# Allegro board StationTestCard.brd
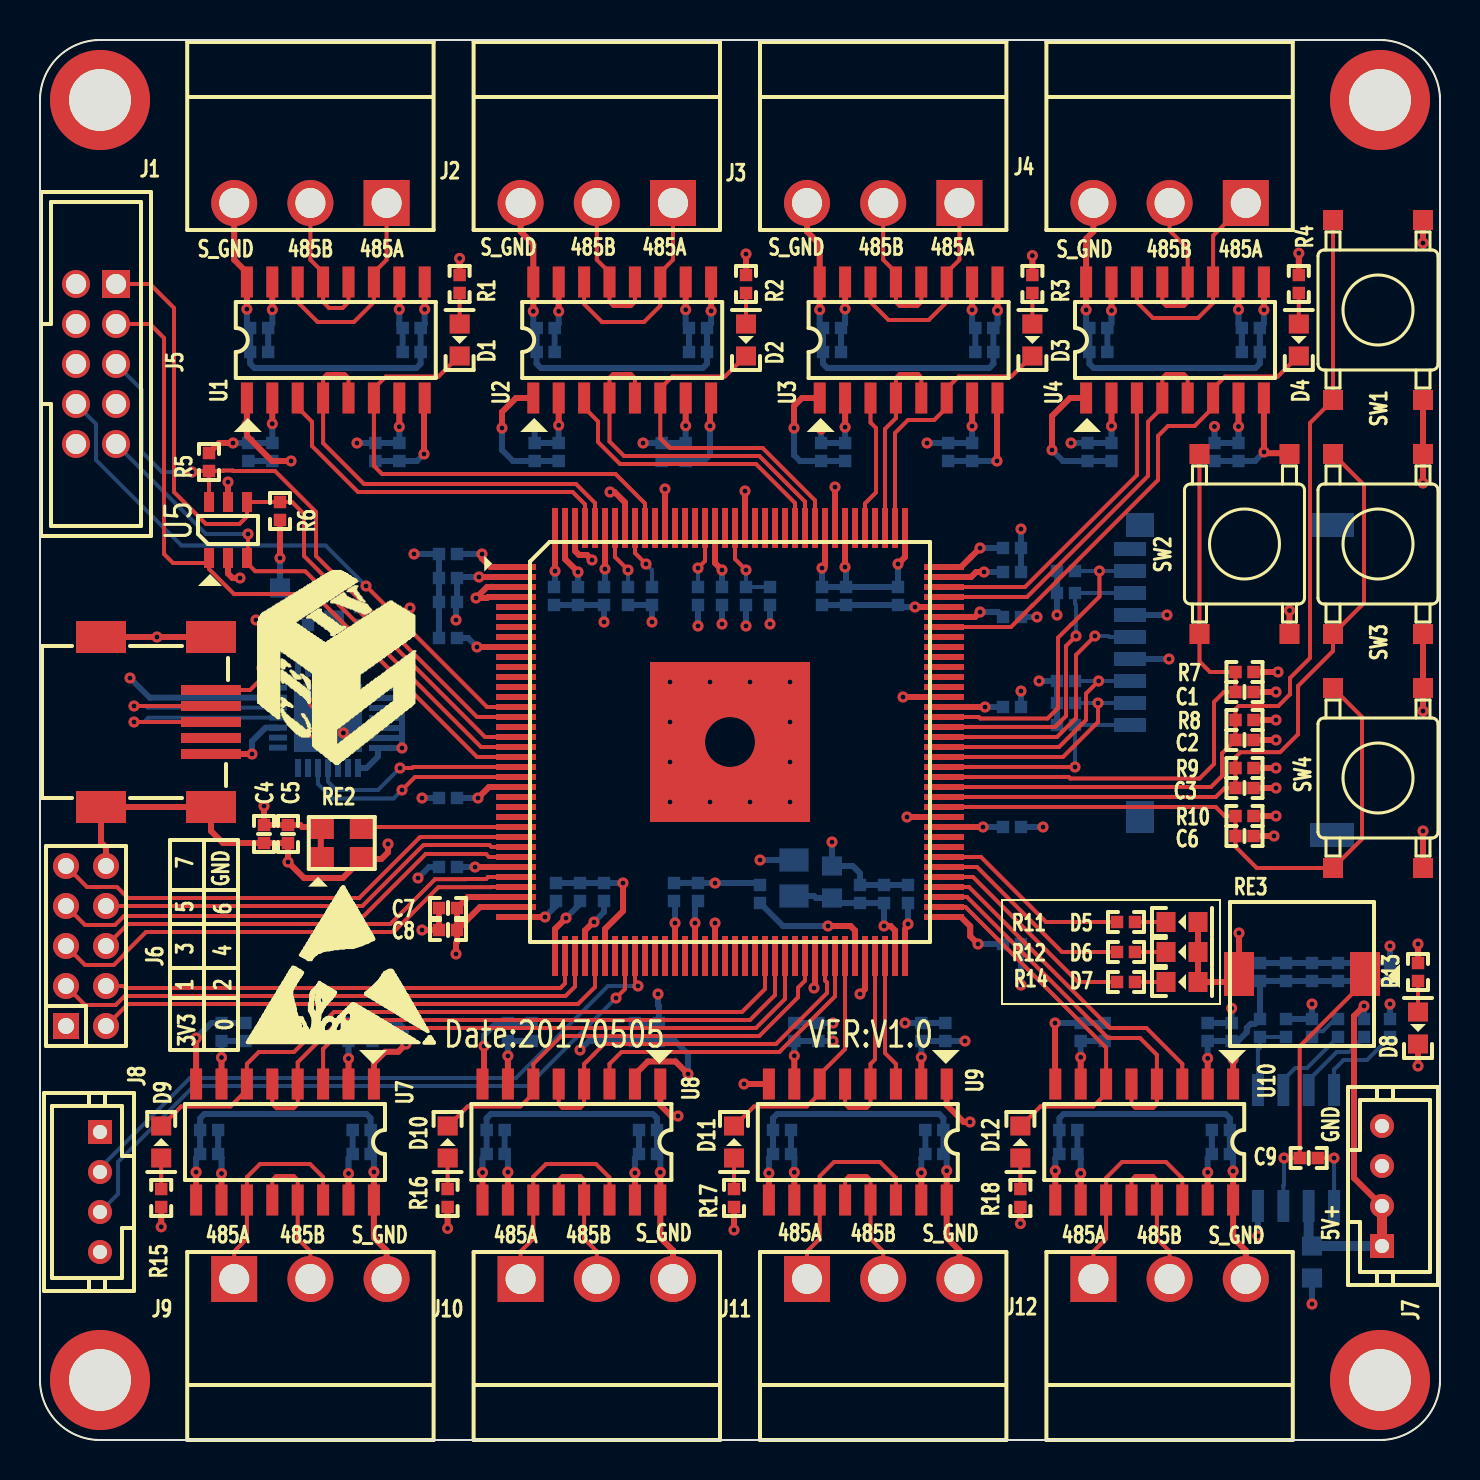
[diagram p0: board, top side]
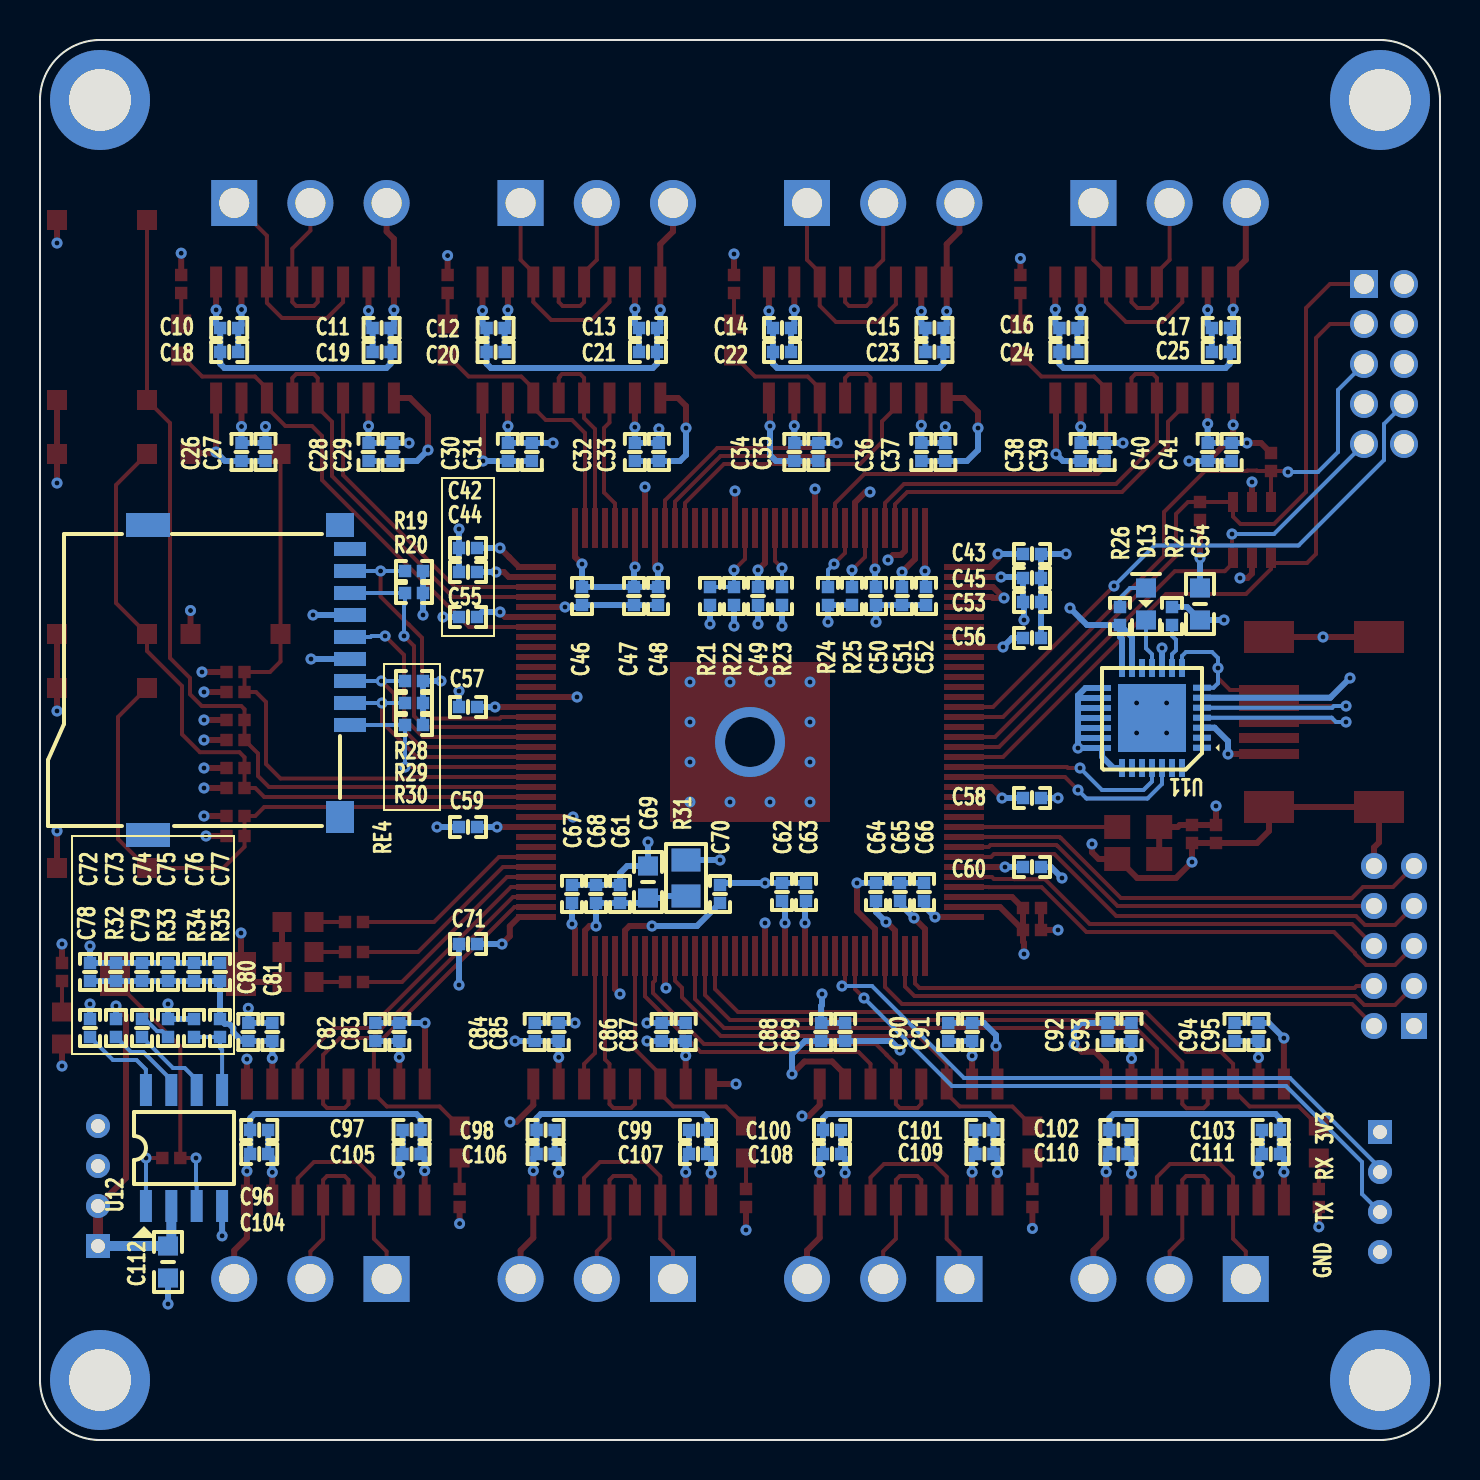
[diagram p1: board, bottom side, seen from below]

Outline 70 x 70 mm; copper layers: TOP, GND, POWER, BOTTOM. Coordinates in mm from the lower left corner of the outline.

## Design rules (mm)
net group DIFF-USB1: nets D+ D-
net group DIFFPAIR1: nets RS485_A1 RS485_B1
net group DIFFPAIR2: nets RS485_A2 RS485_B2
net group DIFFPAIR3: nets RS485_A3 RS485_B3
net group DIFFPAIR4: nets RS485_A4 RS485_B4
net group DIFFPAIR5: nets RS485_A5 RS485_B5
net group DIFFPAIR6: nets RS485_A6 RS485_B6
net group DIFFPAIR7: nets RS485_A7 RS485_B7
net group DIFFPAIR8: nets RS485_A8 RS485_B8
net group POWER: nets A3V3 VCC_5V

## Placement (name value [footprint] x y rotation side)
C1  0.1uF,16V  [CC0402]  60.22 37.4 180 top
C2  0.1uF,16V  [CC0402]  60.22 35 180 top
C3  0.1uF,16V  [CC0402]  60.22 32.6 180 top
C4  2.2uF,16V  [CC0402]  11.2 30.3 270 top
C5  0.1uF,16V  [CC0402]  12.4 30.3 270 top
C6  0.1uF,16V  [CC0402]  60.22 30.2 180 top
C7  0.1uF,16V  [CC0402]  20.4 26.6 0 top
C8  0.1uF,16V  [CC0402]  20.4 25.5 0 top
C9  10nF,16V  [CC0402]  63.44 14.1 0 top
C10  10uF,10V  [CC0402]  60.54 55.6 180 bottom
C11  0.1uF,16V  [CC0402]  52.92 55.6 180 bottom
C12  10uF,10V  [CC0402]  47.22 55.6 180 bottom
C13  0.1uF,16V  [CC0402]  39.6 55.6 180 bottom
C14  10uF,10V  [CC0402]  32.9 55.6 180 bottom
C15  0.1uF,16V  [CC0402]  25.28 55.6 180 bottom
C16  10uF,10V  [CC0402]  18.58 55.6 180 bottom
C17  0.1uF,16V  [CC0402]  10.96 55.6 180 bottom
C18  0.1uF,16V  [CC0402]  60.54 54.4 180 bottom
C19  10nF,16V  [CC0402]  52.92 54.4 180 bottom
C20  0.1uF,16V  [CC0402]  47.22 54.4 180 bottom
C21  10nF,16V  [CC0402]  39.6 54.4 180 bottom
C22  0.1uF,16V  [CC0402]  32.9 54.4 180 bottom
C23  10nF,16V  [CC0402]  25.28 54.4 180 bottom
C24  0.1uF,16V  [CC0402]  18.58 54.4 180 bottom
C25  10nF,16V  [CC0402]  10.96 54.4 180 bottom
C26  0.1uF,16V  [CC0402]  59.92 49.4 90 bottom
C27  10uF,10V  [CC0402]  58.73 49.4 90 bottom
C28  10nF,16V  [CC0402]  53.58 49.4 90 bottom
C29  0.1uF,16V  [CC0402]  52.38 49.4 90 bottom
C30  0.1uF,16V  [CC0402]  46.6 49.4 90 bottom
C31  10uF,10V  [CC0402]  45.41 49.4 90 bottom
C32  10nF,16V  [CC0402]  40.26 49.4 90 bottom
C33  0.1uF,16V  [CC0402]  39.05 49.4 90 bottom
C34  0.1uF,16V  [CC0402]  32.28 49.4 90 bottom
C35  10uF,10V  [CC0402]  31.09 49.4 90 bottom
C36  10nF,16V  [CC0402]  25.93 49.4 90 bottom
C37  0.1uF,16V  [CC0402]  24.73 49.4 90 bottom
C38  0.1uF,16V  [CC0402]  17.96 49.4 90 bottom
C39  10uF,10V  [CC0402]  16.77 49.4 90 bottom
C40  10nF,16V  [CC0402]  11.62 49.4 90 bottom
C41  0.1uF,16V  [CC0402]  10.41 49.4 90 bottom
C42  0.1uF,16V  [CC0402]  48.6 44.6 180 bottom
C43  0.1uF,16V  [CC0402]  20.4 44.3 0 bottom
C44  0.1uF,16V  [CC0402]  48.6 43.4 180 bottom
C45  0.1uF,16V  [CC0402]  20.4 43.1 0 bottom
C46  0.1uF,16V  [CC0402]  42.9 42.2 90 bottom
C47  0.1uF,16V  [CC0402]  40.3 42.2 90 bottom
C48  0.1uF,16V  [CC0402]  39.1 42.2 90 bottom
C49  0.1uF,16V  [CC0402]  34.1 42.2 90 bottom
C50  0.1uF,16V  [CC0402]  28.2 42.2 90 bottom
C51  0.1uF,16V  [CC0402]  26.9 42.2 90 bottom
C52  0.1uF,16V  [CC0402]  25.7 42.2 90 bottom
C53  1uF,16V  [CC0402]  20.4 41.9 0 bottom
C54  0.1uF,16V  [CC0603]  12 41.8 270 bottom
C55  1uF,16V  [CC0402]  48.6 41.15 180 bottom
C56  0.1uF,16V  [CC0402]  20.4 40.1 0 bottom
C57  0.1uF,16V  [CC0402]  48.6 36.65 180 bottom
C58  0.1uF,16V  [CC0402]  20.4 32.1 0 bottom
C59  0.1uF,16V  [CC0402]  48.6 30.65 180 bottom
C60  0.1uF,16V  [CC0402]  20.4 28.65 0 bottom
C61  10uF,10V  [CC0603]  39.6 27.9 270 bottom
C62  0.1uF,16V  [CC0402]  32.9 27.4 270 bottom
C63  0.1uF,16V  [CC0402]  31.7 27.4 270 bottom
C64  1uF,16V  [CC0402]  28.2 27.4 270 bottom
C65  0.1uF,16V  [CC0402]  27 27.4 270 bottom
C66  0.1uF,16V  [CC0402]  25.8 27.4 270 bottom
C67  0.1uF,16V  [CC0402]  43.4 27.3 270 bottom
C68  0.1nF,16V  [CC0402]  42.2 27.3 270 bottom
C69  1uF,16V  [CC0402]  41 27.3 270 bottom
C70  0.1uF,16V  [CC0402]  36 27.3 270 bottom
C71  0.1uF,16V  [CC0402]  48.6 24.8 180 bottom
C72  0.1uF,16V  [CC0402]  67.5 23.4 90 bottom
C73  0.1uF,16V  [CC0402]  66.2 23.4 90 bottom
C74  0.1uF,16V  [CC0402]  64.9 23.4 90 bottom
C75  0.1uF,16V  [CC0402]  63.6 23.4 90 bottom
C76  10uF,10V  [CC0402]  62.3 23.4 90 bottom
C77  10uF,10V  [CC0402]  61 23.4 90 bottom
C78  0.1uF,16V  [CC0402]  67.5 20.6 90 bottom
C79  33nF,16V  [CC0402]  64.9 20.6 90 bottom
C80  0.1uF,16V  [CC0402]  59.59 20.4 270 bottom
C81  10nF,16V  [CC0402]  58.38 20.4 270 bottom
C82  0.1uF,16V  [CC0402]  53.23 20.4 270 bottom
C83  10uF,10V  [CC0402]  52.03 20.4 270 bottom
C84  0.1uF,16V  [CC0402]  45.27 20.4 270 bottom
C85  10nF,16V  [CC0402]  44.06 20.4 270 bottom
C86  10uF,10V  [CC0402]  38.91 20.4 270 bottom
C87  0.1uF,16V  [CC0402]  37.72 20.4 270 bottom
C88  10nF,16V  [CC0402]  30.95 20.4 270 bottom
C89  0.1uF,16V  [CC0402]  29.75 20.4 270 bottom
C90  10uF,10V  [CC0402]  24.59 20.4 270 bottom
C91  0.1uF,16V  [CC0402]  23.39 20.4 270 bottom
C92  0.1uF,16V  [CC0402]  16.62 20.4 270 bottom
C93  10nF,16V  [CC0402]  15.43 20.4 270 bottom
C94  10uF,10V  [CC0402]  10.28 20.4 270 bottom
C95  0.1uF,16V  [CC0402]  9.07 20.4 270 bottom
C96  10nF,16V  [CC0402]  59.04 15.5 0 bottom
C97  0.1uF,16V  [CC0402]  51.42 15.5 0 bottom
C98  10nF,16V  [CC0402]  44.72 15.5 0 bottom
C99  0.1uF,16V  [CC0402]  37.1 15.5 0 bottom
C100  10nF,16V  [CC0402]  30.4 15.5 0 bottom
C101  0.1uF,16V  [CC0402]  22.78 15.5 0 bottom
C102  10nF,16V  [CC0402]  16.08 15.5 0 bottom
C103  0.1uF,16V  [CC0402]  8.46 15.5 0 bottom
C104  0.1uF,16V  [CC0402]  59.04 14.3 0 bottom
C105  10uF,10V  [CC0402]  51.42 14.3 0 bottom
C106  0.1uF,16V  [CC0402]  44.72 14.3 0 bottom
C107  10uF,10V  [CC0402]  37.1 14.3 0 bottom
C108  0.1uF,16V  [CC0402]  30.4 14.3 0 bottom
C109  10uF,10V  [CC0402]  22.78 14.3 0 bottom
C110  0.1uF,16V  [CC0402]  16.08 14.3 0 bottom
C111  10uF,10V  [CC0402]  8.46 14.3 0 bottom
C112  10uF,10V  [CC0603]  63.6 8.9 270 bottom
D1  GREENLED  [LED0603]  20.98 55 270 top
D2  GREENLED  [LED0603]  35.3 55 270 top
D3  GREENLED  [LED0603]  49.62 55 270 top
D4  GREENLED  [LED0603]  62.94 55 270 top
D5  BLUELED  [LED0603]  57.1 25.9 180 top
D6  BLUELED  [LED0603]  57.1 24.4 180 top
D7  BLUELED  [LED0603]  57.1 22.9 180 top
D8  REDLED  [LED0603]  68.9 20.6 270 top
D9  GREENLED  [LED0603]  6.06 14.9 90 top
D10  GREENLED  [LED0603]  20.38 14.9 90 top
D11  GREENLED  [LED0603]  34.7 14.9 90 top
D12  GREENLED  [LED0603]  49.02 14.9 90 top
D13  REDLED  [LED0603]  14.7 41.8 270 bottom
J1  HEADER 3  [WJ15EDGRC-3MM81-R-3P]  13.52 61.85 180 top
J2  HEADER 3  [WJ15EDGRC-3MM81-R-3P]  27.84 61.85 180 top
J3  HEADER 3  [WJ15EDGRC-3MM81-R-3P]  42.16 61.85 180 top
J4  HEADER 3  [WJ15EDGRC-3MM81-R-3P]  56.48 61.85 180 top
J5  JTAG-10  [WR-BHD-2MM]  2.8 53.8 270 top
J6  HEADER 10  [HDR2MMV-5X2P]  2.3 24.7 90 top
J7  HEADER 4  [B4B-PH-K-S]  67.1 12.7 270 top
J8  HEADER 4  [B4B-PH-K-S]  3 12.4 90 top
J9  HEADER 3  [WJ15EDGRC-3MM81-R-3P]  13.52 8.05 0 top
J10  HEADER 3  [WJ15EDGRC-3MM81-R-3P]  27.84 8.05 0 top
J11  HEADER 3  [WJ15EDGRC-3MM81-R-3P]  42.16 8.05 0 top
J12  HEADER 3  [WJ15EDGRC-3MM81-R-3P]  56.48 8.05 0 top
NOREF  -  []  10.3 19.8 0 top
NOREF#2  -  [unnamed#2]  0 0 0 top
NOREF#3  -  []  14.9 38.6 0 top
R1  1K,5%  [CR0402]  20.98 57.8 270 top
R2  1K,5%  [CR0402]  35.3 57.8 270 top
R3  1K,5%  [CR0402]  49.62 57.8 270 top
R4  1K,5%  [CR0402]  62.94 57.8 270 top
R5  10K,5%  [CR0402]  8.45 48.9 90 top
R6  1K,5%  [CR0402]  12 46.45 90 top
R7  10K,5%  [CR0402]  60.22 38.4 180 top
R8  10K,5%  [CR0402]  60.22 36 180 top
R9  10K,5%  [CR0402]  60.22 33.6 180 top
R10  10K,5%  [CR0402]  60.22 31.2 180 top
R11  1K,5%  [CR0402]  54.3 25.9 0 top
R12  1K,5%  [CR0402]  54.3 24.4 0 top
R13  2.2K  [CR0402]  68.9 23.4 90 top
R14  1K,5%  [CR0402]  54.3 22.9 0 top
R15  1K,5%  [CR0402]  6.06 12.1 90 top
R16  1K,5%  [CR0402]  20.38 12.1 90 top
R17  1K,5%  [CR0402]  34.7 12.1 90 top
R18  1K,5%  [CR0402]  49.02 12.1 90 top
R19  10K,5%  [CR0402]  51.3 43.45 0 bottom
R20  10K,5%  [CR0402]  51.3 42.35 0 bottom
R21  0R  [CR0402]  36.5 42.2 90 bottom
R22  1K,5%  [CR0402]  35.3 42.2 270 bottom
R23  1K,5%  [CR0402]  32.9 42.2 270 bottom
R24  1K,5%  [CR0402]  30.6 42.2 270 bottom
R25  1K,5%  [CR0402]  29.4 42.2 270 bottom
R26  10K,5%  [CR0402]  16 41.2 90 bottom
R27  4.7K,5%  [CR0402]  13.4 41.2 270 bottom
R28  10K,5%  [CR0402]  51.3 37.95 0 bottom
R29  10K,5%  [CR0402]  51.3 36.85 0 bottom
R30  10K,5%  [CR0402]  51.3 35.75 0 bottom
R31  500mAFB600ohm  [CR0805]  37.7 28.1 270 bottom
R32  47K,5%  [CR0402]  66.2 20.6 90 bottom
R33  2.2K,1%  [CR0402]  63.6 20.6 90 bottom
R34  10K,1%  [CR0402]  62.3 20.6 270 bottom
R35  26.1K,1%  [CR0402]  61 20.6 270 bottom
RE1  USB-MINI-SOCKET  [USB-MINI-5P]  0.1 35.9 270 top
RE2  -  [XO32-25M]  15.09 29.85 0 top
RE3  10uH  [SLF7055]  63.1 23.3 180 top
RE4  TF_Card  [TFCARD-MICRO-9P]  65 38 270 bottom
SW1  KEY  [SWPB6X6SMD-4P]  66.9 56.5 0 top
SW2  KEY  [SWPB6X6SMD-4P]  60.22 44.8 0 top
SW3  KEY  [SWPB6X6SMD-4P]  66.9 44.8 0 top
SW4  KEY  [SWPB6X6SMD-4P]  66.9 33.1 0 top
U1  ADM2682E  [SOIC-16P]  14.79 55 90 top
U2  ADM2682E  [SOIC-16P]  29.11 55 90 top
U3  ADM2682E  [SOIC-16P]  43.43 55 90 top
U4  ADM2682E  [SOIC-16P]  56.75 55 90 top
U5  SRV05-4  [SOT-23-6P]  9.4 45.5 90 top
U6  10M08SAE144  [EQFP-144P]  34.5 34.9 0 top
U7  ADM2682E  [SOIC-16P]  12.25 14.9 270 top
U8  ADM2682E  [SOIC-16P]  26.57 14.9 270 top
U9  ADM2682E  [SOIC-16P]  40.89 14.9 270 top
U10  ADM2682E  [SOIC-16P]  55.21 14.9 270 top
U11  CP2102  [QFN-28]  14.4 36.1 0 bottom
U12  MP1482DS  [SOIC-8P]  62.8 14.6 90 bottom

## Library data of the parts
C1-C3 C6 C9 C54 C61 C72-C79 C112 = C
C4 = Cap 2.2uF +/-20% 6.3V 0402
C5 C7 C8 C10-C53 C55-C60 C62-C71 C80-C111 = Cap 0.1UF +/-10% 10V 0402
D1-D4 D8-D13 = LED_3
D5-D7 = LED_4
J1-J4 J9-J12 = CON_PH2_0
J5 = JTAG-10
J6 = HEADER 10
J7 = power_connector_1
J8 = CON4
R1-R4 R11-R30 R32-R35 = R
R5 R6 = R_1
R7-R10 = R1 0805
R31 = FerriteBead_1
RE1 = USB_MINI_SOCKET
RE2 = OSC, 100MHz 2.5V x1 CMOS, Si510
RE3 = INDUCTOR
RE4 = TF_Card_0
SW1-SW4 = SW
U1-U4 U7-U10 = ADM2682E_2
U5 = SRV05-4
U6 = 10M08SAE144
U11 = CP2102
U12 = MP1482

## Footprints (pads in the part's own frame, mm; a bottom-side part is the same pattern mirrored in y, then rotated)
B4B-PH-K-S
  rect 1.199x1.199 hole 0.701: 1(3,0)
  round 1.199 hole 0.701: 2(1,0) 3(-1,0) 4(-3,0)
CC0402
  rect 0.62x0.62 smd: 1(-0.45,0) 2(0.45,0)
CC0603
  rect 0.95x1.001 smd: 1(-0.8,0) 2(0.8,0)
CR0402
  rect 0.62x0.62 smd: 1(-0.45,0) 2(0.45,0)
CR0805
  rect 1.151x1.45 smd: 1(-0.9,0) 2(0.9,0)
EQFP-144P
  rect 1.999x0.3 smd: 1(-10.7,8.75) 2(-10.7,8.25) 3(-10.7,7.75) 4(-10.7,7.25) 5(-10.7,6.75) 6(-10.7,6.25) 7(-10.7,5.75) 8(-10.7,5.25) 9(-10.7,4.75) 10(-10.7,4.25) 11(-10.7,3.75) 12(-10.7,3.25) 13(-10.7,2.75) 14(-10.7,2.25) 15(-10.7,1.75) 16(-10.7,1.25) 17(-10.7,0.75) 18(-10.7,0.25) 19(-10.7,-0.25) 20(-10.7,-0.75) 21(-10.7,-1.25) 22(-10.7,-1.75) 23(-10.7,-2.25) 24(-10.7,-2.75) 25(-10.7,-3.25) 26(-10.7,-3.75) 27(-10.7,-4.25) 28(-10.7,-4.75) 29(-10.7,-5.25) 30(-10.7,-5.75) 31(-10.7,-6.25) 32(-10.7,-6.75) 33(-10.7,-7.25) 34(-10.7,-7.75) 35(-10.7,-8.25) 36(-10.7,-8.75) 73(10.7,-8.75) 74(10.7,-8.25) 75(10.7,-7.75) 76(10.7,-7.25) 77(10.7,-6.75) 78(10.7,-6.25) 79(10.7,-5.75) 80(10.7,-5.25) 81(10.7,-4.75) 82(10.7,-4.25) 83(10.7,-3.75) 84(10.7,-3.25) 85(10.7,-2.75) 86(10.7,-2.25) 87(10.7,-1.75) 88(10.7,-1.25) 89(10.7,-0.75) 90(10.7,-0.25) 91(10.7,0.25) 92(10.7,0.75) 93(10.7,1.25) 94(10.7,1.75) 95(10.7,2.25) 96(10.7,2.75) 97(10.7,3.25) 98(10.7,3.75) 99(10.7,4.25) 100(10.7,4.75) 101(10.7,5.25) 102(10.7,5.75) 103(10.7,6.25) 104(10.7,6.75) 105(10.7,7.25) 106(10.7,7.75) 107(10.7,8.25) 108(10.7,8.75)
  rect 0.3x1.999 smd: 37(-8.75,-10.7) 38(-8.25,-10.7) 39(-7.75,-10.7) 40(-7.25,-10.7) 41(-6.75,-10.7) 42(-6.25,-10.7) 43(-5.75,-10.7) 44(-5.25,-10.7) 45(-4.75,-10.7) 46(-4.25,-10.7) 47(-3.75,-10.7) 48(-3.25,-10.7) 49(-2.75,-10.7) 50(-2.25,-10.7) 51(-1.75,-10.7) 52(-1.25,-10.7) 53(-0.75,-10.7) 54(-0.25,-10.7) 55(0.25,-10.7) 56(0.75,-10.7) 57(1.25,-10.7) 58(1.75,-10.7) 59(2.25,-10.7) 60(2.75,-10.7) 61(3.25,-10.7) 62(3.75,-10.7) 63(4.25,-10.7) 64(4.75,-10.7) 65(5.25,-10.7) 66(5.75,-10.7) 67(6.25,-10.7) 68(6.75,-10.7) 69(7.25,-10.7) 70(7.75,-10.7) 71(8.25,-10.7) 72(8.75,-10.7) 109(8.75,10.7) 110(8.25,10.7) 111(7.75,10.7) 112(7.25,10.7) 113(6.75,10.7) 114(6.25,10.7) 115(5.75,10.7) 116(5.25,10.7) 117(4.75,10.7) 118(4.25,10.7) 119(3.75,10.7) 120(3.25,10.7) 121(2.75,10.7) 122(2.25,10.7) 123(1.75,10.7) 124(1.25,10.7) 125(0.75,10.7) 126(0.25,10.7) 127(-0.25,10.7) 128(-0.75,10.7) 129(-1.25,10.7) 130(-1.75,10.7) 131(-2.25,10.7) 132(-2.75,10.7) 133(-3.25,10.7) 134(-3.75,10.7) 135(-4.25,10.7) 136(-4.75,10.7) 137(-5.25,10.7) 138(-5.75,10.7) 139(-6.25,10.7) 140(-6.75,10.7) 141(-7.25,10.7) 142(-7.75,10.7) 143(-8.25,10.7) 144(-8.75,10.7)
  rect 8x8 smd: 145(0,0)
HDR2MMV-5X2P
  rect 1.3x1.3 hole 0.8: 1(-4,1)
  round 1.3 hole 0.8: 2(-4,-1) 3(-2,1) 4(-2,-1) 5(0,1) 6(0,-1) 7(2,1) 8(2,-1) 9(4,1) 10(4,-1)
LED0603
  rect 0.95x1.001 smd: 1(-0.8,0) 2(0.8,0)
QFN-28
  rect 0.899x0.3 smd: 1(-2.5,1.486) 2(-2.5,0.987) 3(-2.5,0.486) 4(-2.5,-0.013) 5(-2.5,-0.513) 6(-2.5,-1.014) 7(-2.5,-1.514) 15(2.5,-1.5) 16(2.5,-1) 17(2.5,-0.5) 18(2.5,0) 19(2.5,0.5) 20(2.5,1) 21(2.5,1.5)
  rect 0.3x0.899 smd: 8(-1.5,-2.5) 9(-1,-2.5) 10(-0.5,-2.5) 11(0,-2.5) 12(0.5,-2.5) 13(1,-2.5) 14(1.5,-2.5) 22(1.5,2.5) 23(1,2.5) 24(0.5,2.5) 25(0,2.5) 26(-0.5,2.5) 27(-1,2.5) 28(-1.5,2.5)
  rect 3.4x3.4 smd: 29(0,0)
SLF7055
  rect 1.501x2.2 smd: 1(-3.15,0) 2(3.15,0)
SOIC-8P
  rect 1.6x0.599 smd: 1(-2.9,1.905) 2(-2.9,0.635) 3(-2.9,-0.635) 4(-2.9,-1.905) 5(2.9,-1.905) 6(2.9,-0.635) 7(2.9,0.635) 8(2.9,1.905)
SOIC-16P
  rect 1.549x0.599 smd: 1(-2.9,4.445) 2(-2.9,3.175) 3(-2.9,1.905) 4(-2.9,0.635) 5(-2.9,-0.635) 6(-2.9,-1.905) 7(-2.9,-3.175) 8(-2.9,-4.445) 9(2.9,-4.445) 10(2.9,-3.175) 11(2.9,-1.905) 12(2.9,-0.635) 13(2.9,0.635) 14(2.9,1.905) 15(2.9,3.175) 16(2.9,4.445)
SOT-23-6P
  rect 1.001x0.5 smd: 1(-1.4,0.95) 2(-1.4,0) 3(-1.4,-0.95) 4(1.4,-0.95) 5(1.4,0) 6(1.4,0.95)
SWPB6X6SMD-4P
  rect 1.001x1.001 smd: 1(-2.25,4.5) 2(-2.25,-4.5) 3(2.25,-4.5) 4(2.25,4.5)
TFCARD-MICRO-9P
  rect 1.199x2.2 smd: (-7.75,0.4) (7.75,0.4)
  rect 1.199x1.399 smd: (-7.75,10)
  round 0 hole 1.001 unplated: (-4.93,0) (3.05,0)
  rect 1.6x1.399 smd: (6.85,10)
  rect 0.701x1.6 smd: 1(2.25,10.5) 2(1.15,10.5) 3(0.05,10.5) 4(-1.05,10.5) 5(-2.15,10.5) 6(-3.25,10.5) 7(-4.35,10.5) 8(-5.45,10.5) 9(-6.55,10.5)
unnamed#2
  round 5 hole 3: (3,67) (3,3) (67,67) (67,3)
USB-MINI-5P
  round 0 hole 1.001 unplated: (-2.2,5.9) (2.2,5.9)
  rect 0.5x3 smd: 1(-1.6,8.45) 2(-0.8,8.45) 3(0,8.45) 4(0.8,8.45) 5(1.6,8.45)
  rect 1.6x2.499 smd: 6(-4.25,8.45) 7(4.25,8.45) 8(-4.25,2.95) 9(4.25,2.95)
WJ15EDGRC-3MM81-R-3P
  rect 2.3x2.3 hole 1.5: 1(-3.81,0)
  round 2.3 hole 1.5: 2(0,0) 3(3.81,0)
WR-BHD-2MM
  rect 1.399x1.399 hole 1.001: 1(-4,1)
  round 1.399 hole 1.001: 2(-4,-1) 3(-2,1) 4(-2,-1) 5(0,1) 6(0,-1) 7(2,1) 8(2,-1) 9(4,1) 10(4,-1)
XO32-25M
  rect 1.3x1.199 smd: 1(-1.05,-0.8) 2(1.05,-0.8) 3(1.05,0.8) 4(-1.05,0.8)

## Nets
A3V3: C7.2 C8.2 C44.2 C45.2 C51.2 C53.2 C61.2 C68.2 C69.2 R31.2 U6.2(VCCA6__2) U6.34(VCCA2__34) U6.35(VCCA1__35) U6.71(VCCA5__71) U6.107(VCCA3__107) U6.143(VCCA4__143)
D3V3: C4.1 C5.1 C26.2 C27.2 C28.2 C29.2 C30.2 C31.2 C32.2 C33.2 C34.2 C35.2 C36.2 C37.2 C38.2 C39.2 C40.2 C41.2 C42.2 C43.2 C46.2 C47.2 C48.2 C49.2 C50.2 C52.2 C54.2 C55.2 C56.2 C57.2 C58.2 C59.2 C60.2 C62.2 C63.2 C64.2 C65.2 C66.2 C67.2 C70.2 C71.2 C72.1 C73.1 C74.1 C75.1 C76.1 C77.1 C80.2 C81.2 C82.2 C83.2 C84.2 C85.2 C86.2 C87.2 C88.2 C89.2 C90.2 C91.2 C92.2 C93.2 C94.2 C95.2 D5.1(A) D6.1(A) D7.1(A) J5.4 J6.1 J8.1 R1.1 R2.1 R3.1 R4.1 R5.2 R7.1 R8.1 R9.1 R10.1 R13.2 R15.1 R16.1 R17.1 R18.1 R19.1 R20.1 R22.2 R23.2 R24.2 R25.2 R26.1 R27.1 R28.1 R29.1 R30.1 R31.1 R35.1 RE2.1(EN) RE2.4(VCC) RE3.2 RE4.4(VDD) U1.2(VCC#2) U1.7(VCC#7) U2.2(VCC#2) U2.7(VCC#7) U3.2(VCC#2) U3.7(VCC#7) U4.2(VCC#2) U4.7(VCC#7) U5.5 U6.1(VCC_ONE__1) U6.9(VCCIO1A__9) U6.23(VCCIO1B__23) U6.31(VCCIO2__31) U6.36(VCC_ONE__36) U6.37(VCC_ONE__37) U6.40(VCCIO3__40) U6.49(VCCIO3__49) U6.51(VCC_ONE__51) U6.67(VCCIO4__67) U6.72(VCC_ONE__72) U6.73(VCC_ONE__73) U6.82(VCCIO5__82) U6.94(VCCIO6__94) U6.103(VCCIO6__103) U6.108(VCC_ONE__108) U6.109(VCC_ONE__109) U6.115(VCC_ONE__115) U6.117(VCCIO7__117) U6.128(VCCIO8__128) U6.139(VCCIO8__139) U6.144(VCC_ONE__144) U7.2(VCC#2) U7.7(VCC#7) U8.2(VCC#2) U8.7(VCC#7) U9.2(VCC#2) U9.7(VCC#7) U10.2(VCC#2) U10.7(VCC#7) U11.6(VDD) U11.10(NC#10) U11.13(NC#13) U11.14(NC#14) U11.15(NC#15) U11.16(NC#16) U11.17(NC#17) U11.18(NC#18) U11.19(NC#19) U11.20(NC#20) U11.21(NC#21) U11.22(NC#22)
GND: C1.1 C2.1 C3.1 C4.2 C5.2 C6.1 C7.1 C8.1 C26.1 C27.1 C28.1 C29.1 C30.1 C31.1 C32.1 C33.1 C34.1 C35.1 C36.1 C37.1 C38.1 C39.1 C40.1 C41.1 C42.1 C43.1 C44.1 C45.1 C46.1 C47.1 C48.1 C49.1 C50.1 C51.1 C52.1 C53.1 C54.1 C55.1 C56.1 C57.1 C58.1 C59.1 C60.1 C61.1 C62.1 C63.1 C64.1 C65.1 C66.1 C67.1 C68.1 C69.1 C70.1 C71.1 C72.2 C73.2 C74.2 C75.2 C76.2 C77.2 C78.2 C80.1 C81.1 C82.1 C83.1 C84.1 C85.1 C86.1 C87.1 C88.1 C89.1 C90.1 C91.1 C92.1 C93.1 C94.1 C95.1 C112.2 D8.2(C) J5.2 J5.10 J6.10 J7.3(GND#3) J7.4(GND#4) J8.4 R6.1 R21.1 R33.2 R34.1 RE1.5(GND) RE1.6(SHIELD1) RE1.7(SHIELD2) RE1.8(SHIELD3) RE1.9(SHIELD4) RE2.2(GND) RE4.6(VSS) SW1.3 SW1.4 SW2.3 SW2.4 SW3.3 SW3.4 SW4.3 SW4.4 U1.1(GND1#1) U1.8(GND1#8) U2.1(GND1#1) U2.8(GND1#8) U3.1(GND1#1) U3.8(GND1#8) U4.1(GND1#1) U4.8(GND1#8) U5.2 U6.3(ANAIN1__3) U6.4(REFGND__4) U6.42(GND__42) U6.53(GND__53) U6.63(GND__63) U6.68(GND__68) U6.83(GND__83) U6.95(GND__95) U6.104(GND__104) U6.116(GND__116) U6.125(GND__125) U6.133(GND__133) U6.137(GND__137) U6.142(GND__142) U6.145(GND__145) U7.1(GND1#1) U7.8(GND1#8) U8.1(GND1#1) U8.8(GND1#8) U9.1(GND1#1) U9.8(GND1#8) U10.1(GND1#1) U10.8(GND1#8) U11.3(GND) U11.29(GND#29) U12.4(GND)
GND_SIGNAL1: C96.2 C97.1 C104.2 C105.1 J12.3(GND) U10.9(GND2#9) U10.16(GND2#16)
GND_SIGNAL2: C98.2 C99.1 C106.2 C107.1 J11.3(GND) U9.9(GND2#9) U9.16(GND2#16)
GND_SIGNAL3: C100.2 C101.1 C108.2 C109.1 J10.3(GND) U8.9(GND2#9) U8.16(GND2#16)
GND_SIGNAL4: C102.2 C103.1 C110.2 C111.1 J9.3(GND) U7.9(GND2#9) U7.16(GND2#16)
GND_SIGNAL5: C10.1 C11.2 C18.1 C19.2 J4.3(GND) U4.9(GND2#9) U4.16(GND2#16)
GND_SIGNAL6: C12.1 C13.2 C20.1 C21.2 J3.3(GND) U3.9(GND2#9) U3.16(GND2#16)
GND_SIGNAL7: C14.1 C15.2 C22.1 C23.2 J2.3(GND) U2.9(GND2#9) U2.16(GND2#16)
GND_SIGNAL8: C16.1 C17.2 C24.1 C25.2 J1.3(GND) U1.9(GND2#9) U1.16(GND2#16)
VCC_5V: C112.1 J7.1(VCC#1) J7.2(VCC#2) R32.2 U12.2(IN)
CLK_25M: RE2.3(OUT) U6.27(IO_2_27/CLK0P/DIFFIO_RX_L18P)
D+: RE1.3(D+) U11.4(D+)
D-: RE1.2(D-) U11.5(D-)
GPIO0: J6.2 U6.41(IO_3_41/DIFFIO_TX_RX_B3N)
GPIO1: J6.3 U6.39(IO_3_39/DIFFIO_TX_RX_B1P)
GPIO2: J6.4 U6.38(IO_3_38/DIFFIO_TX_RX_B1N)
GPIO3: J6.5 U6.33(IO_2_33/PLL_L_CLKOUTP/DIFFIO_RX)
GPIO4: J6.6 U6.32(IO_2_32/PLL_L_CLKOUTN/DIFFIO_RX)
GPIO5: J6.7 U6.30(IO_2_30/VREFB2N0)
GPIO6: J6.8 U6.29(IO_2_29/CLK1P/DIFFIO_RX_L20P)
GPIO7: J6.9 U6.28(IO_2_28/CLK1N/DIFFIO_RX_L20N)
JTAGEN: J5.8 U6.15(IO_1B_15/JTAGEN/DIFFIO_RX_L9P)
KEY0: C1.2 R7.2 SW2.1 SW2.2 U6.87(IO_5_87/DIFFIO_RX_R10N)
KEY1: C2.2 R8.2 SW1.1 SW1.2 U6.86(IO_5_86/DIFFIO_RX_R11N)
KEY2: C3.2 R9.2 SW3.1 SW3.2 U6.85(IO_5_85/DIFFIO_RX_R10P)
RESET_N: C6.2 R10.2 SW4.1 SW4.2 U6.84(IO_5_84/DIFFIO_RX_R11P)
RS485_A1: J12.1(485_A) U10.11(Y) U10.14(A)
RS485_A2: J11.1(485_A) U9.11(Y) U9.14(A)
RS485_A3: J10.1(485_A) U8.11(Y) U8.14(A)
RS485_A4: J9.1(485_A) U7.11(Y) U7.14(A)
RS485_A5: J4.1(485_A) U4.11(Y) U4.14(A)
RS485_A6: J3.1(485_A) U3.11(Y) U3.14(A)
RS485_A7: J2.1(485_A) U2.11(Y) U2.14(A)
RS485_A8: J1.1(485_A) U1.11(Y) U1.14(A)
RS485_B1: J12.2(485_B) U10.12(Z) U10.13(B)
RS485_B2: J11.2(485_B) U9.12(Z) U9.13(B)
RS485_B3: J10.2(485_B) U8.12(Z) U8.13(B)
RS485_B4: J9.2(485_B) U7.12(Z) U7.13(B)
RS485_B5: J4.2(485_B) U4.12(Z) U4.13(B)
RS485_B6: J3.2(485_B) U3.12(Z) U3.13(B)
RS485_B7: J2.2(485_B) U2.12(Z) U2.13(B)
RS485_B8: J1.2(485_B) U1.12(Z) U1.13(B)
RS485_DE1: U6.75(IO_5_75/DIFFIO_RX_R1P) U10.4(R\E\) U10.5(DE)
RS485_DE2: U6.69(IO_4_69/DIFFIO_TX_RX_B27N) U9.4(R\E\) U9.5(DE)
RS485_DE3: U6.64(IO_4_64/DIFFIO_TX_RX_B23N) U8.4(R\E\) U8.5(DE)
RS485_DE4: U6.59(IO_3_59/DIFFIO_TX_RX_B16N) U7.4(R\E\) U7.5(DE)
RS485_DE5: U4.4(R\E\) U4.5(DE) U6.105(IO_6_105/DIFFIO_RX_R33P)
RS485_DE6: U3.4(R\E\) U3.5(DE) U6.111(IO_7_111/DIFFIO_RX_T1N)
RS485_DE7: U2.4(R\E\) U2.5(DE) U6.119(IO_7_119/DIFFIO_RX_T10N)
RS485_DE8: U1.4(R\E\) U1.5(DE) U6.140(IO_8_140/DIFFIO_RX_T26P)
RS485_RXD1: U6.76(IO_5_76/DIFFIO_RX_R2N) U10.3(RXD)
RS485_RXD2: U6.70(IO_4_70/DIFFIO_TX_RX_B27P) U9.3(RXD)
RS485_RXD3: U6.65(IO_4_65/DIFFIO_TX_RX_B23P) U8.3(RXD)
RS485_RXD4: U6.60(IO_3_60/DIFFIO_TX_RX_B16P) U7.3(RXD)
RS485_RXD5: U4.3(RXD) U6.106(IO_6_106/DIFFIO_RX_R33N)
RS485_RXD6: U3.3(RXD) U6.113(IO_7_113/DIFFIO_RX_T4N)
RS485_RXD7: U2.3(RXD) U6.120(IO_8_120/DIFFIO_RX_T16P)
RS485_RXD8: U1.3(RXD) U6.141(IO_8_141/DIFFIO_RX_T26N)
RS485_TXD1: D12.2(C) U6.74(IO_5_74/DIFFIO_RX_R2P) U10.6(TXD)
RS485_TXD2: D11.2(C) U6.66(IO_4_66/DIFFIO_TX_RX_B25N) U9.6(TXD)
RS485_TXD3: D10.2(C) U6.62(IO_4_62/DIFFIO_TX_RX_B20P) U8.6(TXD)
RS485_TXD4: D9.2(C) U6.58(IO_3_58/DIFFIO_TX_RX_B14P) U7.6(TXD)
RS485_TXD5: D4.2(C) U4.6(TXD) U6.102(IO_6_102/DIFFIO_RX_R28N)
RS485_TXD6: D3.2(C) U3.6(TXD) U6.110(IO_7_110/DIFFIO_RX_T1P)
RS485_TXD7: D2.2(C) U2.6(TXD) U6.118(IO_7_118/DIFFIO_RX_T10P)
RS485_TXD8: D1.2(C) U1.6(TXD) U6.135(IO_8_135/DIFFIO_RX_T23N)
TCK: J5.1 R6.2 U5.4 U6.18(IO_1B_18/TCK/DIFFIO_RX_L11P)
TDI: J5.9 U5.3 U6.19(IO_1B_19/TDI/DIFFIO_RX_L12N)
TDO: J5.3 U5.1 U6.20(IO_1B_20/TDO/DIFFIO_RX_L12P)
TF_CLK: RE4.5(CLK) U6.91(IO_6_91/CLK3N/DIFFIO_RX_R16N)
TF_CMD: R28.2 RE4.3(CMD) U6.90(IO_6_90/CLK3P/DIFFIO_RX_R16P)
TF_DATA0: R20.2 RE4.7(DATA0) U6.92(IO_6_92/DIFFIO_RX_R18P)
TF_DATA1: R19.2 RE4.8(DATA1) U6.93(IO_6_93/DIFFIO_RX_R18N)
TF_DATA2: R30.2 RE4.1(DATA2) U6.88(IO_6_88/CLK2P/DIFFIO_RX_R14P)
TF_DATA3: R29.2 RE4.2(CD/DATA3) U6.89(IO_6_89/CLK2N/DIFFIO_RX_R14N)
TMS: J5.5 R5.1 U5.6 U6.16(IO_1B_16/TMS/DIFFIO_RX_L11N)
UART_RXD0: U6.21(IO_1B_21/DIFFIO_RX_L14N) U11.25(RXD)
UART_RXD1: J8.2 U6.45(IO_3_45/DIFFIO_TX_RX_B5P)
UART_TXD0: U6.22(IO_1B_22/DIFFIO_RX_L14P) U11.26(TXD)
UART_TXD1: J8.3 U6.44(IO_3_44/DIFFIO_TX_RX_B5N)
USER_LED0: R11.1 U6.79(IO_5_79/DIFFIO_RX_R7P)
USER_LED1: R12.1 U6.78(IO_5_78)
USER_LED2: R14.1 U6.77(IO_5_77/DIFFIO_RX_R1N)
N16189511: C96.1 C104.1 U10.15(VI)
N16194711: C97.2 C105.2 U10.10(VO)
N16196004: C99.2 C107.2 U9.10(VO)
N16196080: C98.1 C106.1 U9.15(VI)
N16196868: C101.2 C109.2 U8.10(VO)
N16196960: C100.1 C108.1 U8.15(VI)
N16197220: C103.2 C111.2 U7.10(VO)
N16197296: C102.1 C110.1 U7.15(VI)
N16223658: C10.2 C18.2 U4.10(VO)
N16223734: C11.1 C19.1 U4.15(VI)
N16224068: C12.2 C20.2 U3.10(VO)
N16224152: C13.1 C21.1 U3.15(VI)
N16224546: C14.2 C22.2 U2.10(VO)
N16224642: C15.1 C23.1 U2.15(VI)
N16224916: C16.2 C24.2 U1.10(VO)
N16224992: C17.1 C25.1 U1.15(VI)
N16238202: R24.1 U6.136(IO_8_136/NSTATUS/DIFFIO_RX_T24P)
N16238206: R25.1 U6.138(IO_8_138/CONF_DONE/DIFFIO_RX_T2)
N16238215: R23.1 U6.129(INPUT_ONLY_8_129/NCONFIG)
N16238304: R21.2 R22.1 U6.126(IO_8_126/BOOT_SEL)
N16244234: RE1.1(VBUS) U11.7(REGIN) U11.8(BUS)
N16245813: R27.2 U11.9(R\S\T\)
N16273316: D12.1(A) R18.2
N16274102: D11.1(A) R17.2
N16274310: D10.1(A) R16.2
N16274517: D9.1(A) R15.2
N16274721: D4.1(A) R4.2
N16274926: D3.1(A) R3.2
N16275140: D2.1(A) R2.2
N16275349: D1.1(A) R1.2
N16281642: R32.1 U12.7(EN)
N16281718: C78.1 U12.8(SS)
N16281770: C79.2 R33.1
N16281802: C9.1 RE3.1 U12.3(SW)
N16281822: C9.2 U12.1(BS)
N16281842: R34.2 R35.2 U12.5(FB)
N16282182: D8.1(A) R13.1
N16289685: D6.2(C) R12.2
N16289689: D7.2(C) R14.2
N16289713: D5.2(C) R11.2
N16290377: D13.2(C) U11.11(S\U\S\P\E\N\D\)
N16290384: D13.1(A) R26.2
N16347907: C79.1 U12.6(COMP)

Pads without a net: J5 6 7; RE1 4; RE4 9; U6 5 6 7 8 10 11 12 13 14 17 24 25 26 43 46 47 48 50 52 54 55 56 57 61 80 81 96 97 98 99 100 101 112 114 121 122 123 124 127 130 131 132 134; U11 1 2 12 23 24 27 28

## Via types
v1: diameter 0.55, hole 0.25, TOP to BOTTOM, 224 vias
v2: diameter 3.5, hole 2.5, TOP to BOTTOM, 1 via

## Routing (per net, layer and track width the routed paths; a pad name or vN(x,y) marks a point on that pad's centre or on a via; arc(x,y) is an arc through that point)
A3V3: length 93.8
  TOP w0.3: v1(47.2,43.4) 46.81,43.4 46.56,43.15 U6.107 ; C8.2 20.85,24.91 20.8,24.86 v1(20.8,24.3) ; C8.2 C7.2 21.4,27.15 U6.34 ; C8.2 22,26.65 U6.35 ; v1(21.95,43.15) U6.2 ; v1(26.9,43.4) 26.25,44.05 U6.143 ; v1(42.2,25.7) 42.53,25.7 42.75,25.48 U6.71
  POWER w0.3: v1(21.95,43.15) 23.2,44.4 25.9,44.4 v1(26.9,43.4) 28,42.3 46.1,42.3 v1(47.2,43.4) ; v1(20.8,41) v1(20.8,24.3) 40.8,24.3 v1(42.2,25.7)
  BOTTOM w0.3: v1(21.95,43.15) 20.9,43.15 C45.2 C53.2 20.8,41.85 v1(20.8,41) ; v1(42.2,25.7) C68.2 C69.2 39.85,26.85 C61.2 38.8,27.1 38.7,27.2 R31.2 ; v1(47.2,43.4) C44.2 ; v1(26.9,43.4) C51.2
D3V3: length 238.7
  TOP w0.3: R2.1 v1(35.3,59.3) ; v1(11.2,31.7) C4.1 C5.1 13.01,30.75 13.11,30.65 RE2.4 RE2.1 ; R7.1 v1(61.9,38.4) ; U3.2 v1(40.26,50.65) ; U2.7 v1(32.28,50.72) ; U1.7 v1(17.96,50.66) ; v1(46.9,24.8) 46.51,25.19 46.51,25.69 46.05,26.15 U6.73 ; U6.51 v1(32.75,25.85) ; U6.49 v1(31.75,25.85) ; U2.2 v1(25.93,50.73) ; R1.1 v1(20.98,59.08) ; D5.1 D6.1 D7.1 59.55,22.9 RE3.2 v1(59.95,25.35) ; v1(47.25,36.65) U6.94 ; U6.23 22.45,32.65 v1(21.9,32.1) ; R9.1 v1(61.8,33.6) ; U4.7 v1(59.92,50.67) ; U6.1 22.52,43.65 22.1,44.07 v1(22.1,44.3) ; v1(47,44.6) 46.54,44.14 46.05,43.65 U6.108 ; U9.7 v1(37.72,19.21) ; R3.1 v1(49.62,59.22) ; v1(39.1,43.6) 39.25,43.75 U6.117 ; U6.72 43.25,25.55 43.4,25.7 v1(43.4,25.8) ; v1(34.1,43.5) 33.75,43.85 U6.128 ; R8.1 v1(61.8,36) ; R15.1 v1(6.06,10.66) ; U5.5 v1(9.4,47.9) ; v1(47,41.4) 46.75,41.15 U6.103 ; 11.62,52.1 v1(11.62,50.81) ; v1(9.65,49.85) 8.95,49.85 R5.2 ; U6.115 v1(40.25,43.65) ; R17.1 v1(34.7,10.5) ; R10.1 v1(61.8,31.2) ; U8.7 v1(23.39,19.2) ; v1(21.85,39.65) U6.9 ; U10.7 v1(52.03,19.14) ; v1(27.7,25.9) 27.67,25.9 27.25,25.48 U6.40 ; U8.2 29.75,18.27 30.39,18.92 31.78,18.92 v1(32.4,18.3) ; R16.1 v1(20.38,10.58) ; U9.2 v1(44.06,19.14) ; R13.2 v1(68.9,24.8) ; U4.2 v1(53.58,50.7) ; U6.144 v1(25.75,43.45) ; U3.7 v1(46.6,50.7) ; R4.1 v1(62.94,59.34) ; U6.139 v1(28.25,43.55) ; U7.2 v1(15.43,19.07) ; v1(47.15,30.65) U6.82 ; U6.36 v1(25.25,26.15) ; v1(26.3,26.1) 25.75,25.55 U6.37 ; v1(21.75,28.65) U6.31 ; U10.2 v1(58.38,19.09) ; v1(39.4,25.7) 40.53,25.7 40.75,25.48 U6.67 ; U6.109 43.25,44.15 v1(42.9,43.8) ; v1(9.07,19.12) U7.7 ; R18.1 v1(49.02,10.82)
  POWER w0.3: J8.1 3,16.18 ; J8.1 3.78,15.4 ; J8.1 2.22,15.4 ; J8.1 3,14.62 ; J6.1 1.3,21.53 ; J6.1 2.13,20.7 ; J6.1 1.3,19.87 ; J6.1 0.47,20.7 ; J5.4 2.68,55.8 ; J5.4 0.92,55.8 ; J5.4 1.8,54.92 ; J5.4 1.8,56.68
  BOTTOM w0.3: R31.1 v1(36,29) ; v1(9.65,49.85) C41.2 C40.2 v1(11.62,50.81) ; v1(47,44.6) C42.2 ; C64.2 28.2,26.4 v1(27.7,25.9) ; C43.2 v1(22.1,44.3) ; v1(51.55,49.85) C29.2 C28.2 v1(53.58,50.7) ; v1(25.75,43.45) 25.75,42.7 C52.2 ; C47.2 C48.2 v1(39.1,43.6) ; C47.2 40.3,43.6 v1(40.25,43.65) ; C47.2 C46.2 v1(42.9,43.8) ; C90.2 C91.2 v1(23.39,19.2) ; C65.2 27,26.8 v1(26.3,26.1) ; RE4.4 v1(56.45,39.05) ; v1(28.25,43.55) 28.25,42.7 C50.2 ; v1(18.5,41.6) 17.65,40.75 R26.1 ; C92.2 C93.2 v1(15.43,19.07) ; v1(39.4,25.7) 37.15,25.7 C70.2 ; U11.19 18.1,35.6 ; 18.1,35.6 18.1,35.17 ; 18.1,35.6 18.1,36.1 ; R26.1 16,40.16 15.9,40.06 U11.14 ; R26.1 15.4,40.15 U11.13 ; v1(10.8,41) C54.2 12.65,41.65 R27.1 ; v1(17.96,50.66) C38.2 C39.2 v1(15.85,49.85) ; v1(32.4,18.3) 32.4,19.3 31.75,19.95 C88.2 C89.2 27.45,19.95 v1(27,19.5) ; v1(47.15,30.65) C59.2 ; v1(50.85,41.25) R20.1 R19.1 ; R25.2 R24.2 v1(30.6,40.9) ; v1(47.25,36.65) C57.2 ; v1(40.26,50.65) C32.2 C33.2 v1(39.05,50.55) ; C49.2 v1(34.1,43.5) ; v1(58.73,50.67) C27.2 C26.2 v1(59.92,50.67) ; U11.10 v1(13.9,39.6) ; U11.18 18.1,36.1 ; 18.1,36.1 18.1,36.6 ; U11.22 16.33,33.6 16.9,34.17 U11.21 v1(18.1,34.6) 18.1,35.17 ; 18.1,35.17 18.03,35.1 U11.20 ; U11.6 5.49,37.11 v1(4.5,38.1) ; v1(43.4,25.8) C67.2 ; C58.2 v1(21.9,32.1) ; v1(25.25,26.15) 25.8,26.7 C66.2 ; v1(25.93,50.73) C36.2 C37.2 v1(24.73,50.66) ; C55.2 47.9,41.4 v1(47,41.4) ; 18.1,37.1 18.1,37.23 17.73,37.6 U11.15 ; 18.1,37.1 18.1,36.6 ; 18.1,37.1 U11.16 ; C62.2 32.75,26.8 v1(32.75,25.85) ; v1(52.03,19.14) C83.2 C82.2 ; v1(32.28,50.72) C34.2 C35.2 v1(30.15,49.85) ; v1(9.07,19.12) C95.2 C94.2 ; v1(46.6,50.7) C30.2 C31.2 v1(44.35,49.85) ; R22.2 v1(35.3,40.7) ; v1(58.38,19.09) C81.2 C80.2 59.9,19.95 60.34,20.39 60.34,20.6 60.55,20.81 60.76,20.81 R35.1 C77.1 C76.1 C75.1 C74.1 C73.1 C72.1 ; 18.1,36.6 U11.17 ; R30.1 R29.1 R28.1 v1(49.95,37.95) ; C56.2 21.4,40.1 v1(21.85,39.65) ; v1(37.72,19.21) C87.2 C86.2 v1(39.65,19.95) ; C60.2 v1(21.75,28.65) ; C63.2 31.75,26.9 v1(31.75,25.85) ; v1(44.06,19.14) C85.2 C84.2 v1(46.25,19.95) ; C71.2 v1(46.9,24.8) ; R23.2 v1(32.9,40.7)
GND: length 245.3
  TOP w0.3: U6.137 29.25,46.88 28.73,47.4 v1(28.5,47.4) ; U1.8 19.2,52.06 v1(19.2,49.3) ; v1(47.85,48.95) 47.85,52.08 U3.8 ; C2.1 v1(61.8,35) ; v1(37.7,50.6) 37.7,51.7 38.1,52.1 U3.1 ; v1(22.2,19.7) 22.2,17.88 U8.8 ; v1(35.25,47.45) U6.125 ; U6.104 v1(43.75,41.65) ; v1(38.7,22.6) 38.75,22.65 U6.63 ; C3.1 v1(61.8,32.6) ; v1(41,22.3) 41.25,22.55 U6.68 ; v1(12.55,48.95) 11.6,48.95 10.35,50.2 v1(10.35,50.76) U1.1 ; C1.1 v1(61.8,37.4) ; SW2.4 62.43,49.34 61.26,49.34 v1(61.2,49.4) 61.2,49.95 61.2,49.96 U4.8 ; v1(31.9,16.2) 31.56,16.2 31.02,16.75 U8.1 ; SW2.3 v1(62.47,41.47) ; v1(39.75,47.65) U6.116 ; U6.142 26.75,44.46 26.96,44.25 27.35,44.25 v1(27.6,44) ; SW1.3 SW3.4 v1(69.15,47.85) ; SW3.3 SW4.4 v1(69.15,36.45) ; SW4.3 v1(69.15,30.45) ; RE1.8 v1(5.85,40.15) RE1.6 ; v1(17.4,29.8) 17.4,29.38 17.07,29.05 RE2.2 16.09,29.05 15.14,28.1 13.2,28.1 v1(12.4,28.9) C5.2 C4.2 9.15,29.85 8.55,30.45 RE1.7 RE1.9 3.05,29.88 3.3,29.63 J6.10 ; v1(50.6,49.5) 50.6,51.2 51.5,52.1 U4.1 ; U6.3 22.35,42.65 v1(21.8,42.1) 22.35,42.1 22.4,42.15 U6.4 ; U2.1 23.8,52.1 23.1,51.4 v1(23.1,50.6) ; U9.1 45.34,16.75 46.18,15.9 v1(46.5,15.9) ; U6.95 v1(43.15,37.15) ; v1(18.3,19.8) 17.91,19.41 17.25,19.41 16.7,18.85 U7.1 ; v1(10,43.1) 9.62,43.1 9.4,43.32 U5.2 ; C7.1 C8.1 v1(19.1,25.5) ; RE1.5 v1(10.6,34.3) ; U7.8 v1(7.8,20.09) ; v1(33.5,50.7) 33.5,52.05 U2.8 ; v1(50.75,20.85) 50.75,17.82 U10.8 ; R6.1 v1(12,44.1) ; U6.42 28.25,25.55 29.15,26.45 v1(29.15,27.85) ; U6.53 v1(33.75,25.85) ; C6.1 v1(61.7,30.2) ; U10.1 v1(59.66,19.05) ; D8.2 v1(68.9,18.7) ; SW1.4 v1(69.15,59.85) ; v1(35.2,17.8) U9.8 ; v1(31.25,47.55) U6.133 ; U6.83 v1(43.35,31.15)
  GND w0.3: J5.2 2.68,57.8 ; J5.2 1.8,56.92 ; J5.2 0.92,57.8 ; J5.2 1.8,58.68 ; 66.32,15.7 J7.4 ; J7.4 67.88,15.7 ; J7.4 67.1,16.48 ; J7.4 67.1,14.92 ; J7.3 67.1,14.48 ; J7.3 67.88,13.7 ; J7.3 67.1,12.92 ; J7.3 66.32,13.7 ; J8.4 3.78,9.4 ; J8.4 2.22,9.4 ; J8.4 3,8.62 ; J8.4 3,10.18 ; J6.10 3.3,29.53 ; J6.10 2.47,28.7 ; J6.10 4.13,28.7 ; J6.10 3.3,27.87 ; 0.92,49.8 J5.10 ; J5.10 1.8,50.68 ; J5.10 2.68,49.8 ; J5.10 1.8,48.92
  BOTTOM w0.3: v1(29.15,27.85) C64.1 C65.1 C66.1 ; C52.1 C51.1 C50.1 v1(28.2,40.9) ; C63.1 C62.1 v1(33.75,27.85) 35.9,27.85 C70.1 ; v1(33.5,50.7) 33.5,49.25 33.2,48.95 C34.1 C35.1 ; C81.1 C80.1 v1(59.59,21.59) ; C94.1 C95.1 8.56,20.85 v1(7.8,20.09) ; v1(43.25,20.85) C85.1 C84.1 ; C57.1 v1(49.05,37.45) ; C56.1 C53.1 C45.1 C43.1 v1(18.7,44.3) ; U11.3 11.27,35.61 10.6,34.94 v1(10.6,34.3) ; v1(39.65,20.85) C86.1 C87.1 ; R21.1 v1(36.5,40.8) ; v1(18.3,19.8) 18.3,20.5 17.95,20.85 C92.1 C93.1 ; v1(47.85,48.95) C30.1 C31.1 ; v1(23.1,50.6) 23.1,49.5 23.65,48.95 C37.1 C36.1 ; C32.1 C33.1 38,48.95 37.7,49.25 v1(37.7,50.6) ; C27.1 C26.1 60.75,48.95 v1(61.2,49.4) ; C78.2 v1(67.5,21.8) ; C67.1 C68.1 C69.1 41,28.34 40.64,28.7 C61.1 v1(39.6,29.9) ; C54.1 v1(12,44.1) ; C49.1 v1(34.1,40.8) ; C41.1 C40.1 v1(12.55,48.95) ; v1(22.2,19.7) 22.2,20.24 22.81,20.85 C91.1 C90.1 ; v1(67.5,24.7) C72.2 C73.2 C74.2 C75.2 C76.2 C77.2 ; C112.2 v1(63.6,6.8) ; C55.1 v1(49.85,41.15) ; C60.1 19.45,28.65 v1(18.9,28.1) ; C71.1 v1(49.05,22.75) ; C28.1 C29.1 51.15,48.95 v1(50.6,49.5) ; v1(49.05,45.55) C42.1 C44.1 ; RE4.6 v1(56.35,41.25) ; v1(43.75,41.65) 43,41.65 C46.1 C47.1 C48.1 ; 60.9,11.7 v1(60.9,10.21) ; v1(63.6,21.8) R33.2 R34.1 ; C89.1 C88.1 30.95,21.7 30.9,21.75 v1(30.9,22.3) ; v1(19.2,49.3) 18.85,48.95 C38.1 C39.1 ; C58.1 v1(19.1,32.1) ; v1(50.75,20.85) C83.1 C82.1 ; C59.1 v1(50.15,30.65)
  vias: v1(13.67,36.85) v1(13.67,35.35) v1(15.17,36.85) v1(15.17,35.35) v1(31.5,37.9) v1(31.5,35.9) v1(31.5,33.9) v1(31.5,31.9) v1(33.5,37.9) v1(33.5,31.9) v1(35.5,37.9) v1(35.5,31.9) v1(37.5,37.9) v1(37.5,35.9) v1(37.5,33.9) v1(37.5,31.9) v2(34.5,34.9)
GND_SIGNAL1: length 21.2
  TOP w0.3: U10.9 v1(50.77,13.46) ; J12.3 60.29,9.48 59.66,10.11 U10.16 v1(59.66,13.45)
  BOTTOM w0.3: v1(50.77,13.46) 50.77,14.1 C105.1 C97.1 50.97,16.09 51.18,16.3 59.28,16.3 59.49,16.09 C96.2 C104.2 59.66,14.13 v1(59.66,13.45)
GND_SIGNAL2: length 21.2
  TOP w0.3: J11.3 45.97,9.48 45.34,10.11 U9.16 v1(45.34,13.46) ; U9.9 v1(36.45,13.35)
  BOTTOM w0.3: v1(36.45,13.35) 36.45,14.1 C107.1 C99.1 36.65,16.09 36.86,16.3 44.96,16.3 45.17,16.09 C98.2 C106.2 45.34,14.13 v1(45.34,13.46)
GND_SIGNAL3: length 21.2
  TOP w0.3: v1(31.02,13.38) U8.16 31.02,10.11 31.65,9.48 J10.3 ; U8.9 v1(22.12,13.38)
  BOTTOM w0.3: v1(31.02,13.38) 31.02,14.13 C108.2 C100.2 30.85,16.09 30.64,16.3 22.54,16.3 22.33,16.09 C101.1 C109.1 22.12,14.1 v1(22.12,13.38)
GND_SIGNAL4: length 21.2
  TOP w0.3: U7.9 v1(7.8,13.39) ; J9.3 17.33,9.48 16.7,10.11 U7.16 v1(16.7,13.4)
  BOTTOM w0.3: v1(7.8,13.39) 7.8,14.1 C111.1 C103.1 8.01,16.09 8.22,16.3 16.32,16.3 16.53,16.09 C102.2 C110.2 16.7,14.13 v1(16.7,13.4)
GND_SIGNAL5: length 21.1
  TOP w0.3: U4.9 v1(61.2,56.51) ; v1(52.3,56.51) U4.16 52.3,60.06 52.67,60.42 J4.3
  BOTTOM w0.3: v1(61.2,56.51) 61.2,55.8 C10.1 C18.1 60.99,53.81 60.78,53.6 52.68,53.6 52.47,53.81 C19.2 C11.2 52.3,55.77 v1(52.3,56.51)
GND_SIGNAL6: length 21.2
  TOP w0.3: v1(38.98,56.52) U3.16 38.98,59.79 38.35,60.42 J3.3 ; U3.9 v1(47.88,56.48)
  BOTTOM w0.3: v1(38.98,56.52) 38.98,55.77 C13.2 C21.2 39.15,53.81 39.36,53.6 47.46,53.6 47.67,53.81 C20.1 C12.1 47.88,55.8 v1(47.88,56.48)
GND_SIGNAL7: length 21.2
  TOP w0.3: v1(24.66,56.44) U2.16 24.66,59.79 24.03,60.42 J2.3 ; U2.9 v1(33.55,56.45)
  BOTTOM w0.3: v1(24.66,56.44) 24.66,55.77 C15.2 C23.2 24.83,53.81 25.04,53.6 33.14,53.6 33.35,53.81 C22.1 C14.1 33.55,55.8 v1(33.55,56.45)
GND_SIGNAL8: length 21.2
  TOP w0.3: J1.3 9.71,59.01 10.35,58.38 U1.16 v1(10.35,56.55) ; U1.9 v1(19.23,56.53)
  BOTTOM w0.3: v1(19.23,56.53) 19.23,55.8 C16.1 C24.1 19.03,53.81 18.82,53.6 10.72,53.6 10.51,53.81 C25.2 C17.2 10.35,55.77 v1(10.35,56.55)
VCC_5V: length 19
  TOP w0.3: J7.2 65.7,13.1 65.7,21.2 v1(66.2,21.7)
  TOP w0.5: J7.1 J7.2
  BOTTOM w0.3: R32.2 v1(66.2,21.7)
  BOTTOM w0.5: J7.1 C112.1 63.44,9.87 63.44,11.7
CLK_25M: length 7.7
  TOP w0.2: U6.27 RE2.3
D+: length 11.1
  TOP w0.2: v1(4.7,35.9) RE1.3
  BOTTOM w0.2: v1(4.7,35.9) 5.2,35.9 5.42,36.11 U11.4
D-: length 11.1
  TOP w0.2: v1(4.7,36.7) RE1.2
  BOTTOM w0.2: U11.5 5.39,36.61 5.3,36.7 v1(4.7,36.7)
GPIO0: length 26.8
  TOP w0.2: J6.2 4.4,21.8 26.9,21.8 27.75,22.65 U6.41
GPIO1: length 27.8
  TOP w0.2: U6.39 26.75,22.67 26.28,22.2 4.23,22.2 3.78,21.75 2.25,21.75 J6.3
GPIO2: length 24.5
  TOP w0.2: U6.38 26.25,22.83 26.02,22.6 4.28,22.6 4.18,22.7 J6.4
GPIO3: length 24.5
  TOP w0.2: J6.5 2.25,23.75 3.69,23.75 4.25,24.31 4.25,24.35 5.3,25.4 17.68,25.4 19.92,27.64 22.56,27.64 22.57,27.65 U6.33
GPIO4: length 21.9
  TOP w0.2: J6.6 4.4,25.8 17.51,25.8 19.75,28.04 21.28,28.04 21.29,28.05 22.3,28.05 22.4,28.15 U6.32
GPIO5: length 24.4
  TOP w0.2: U6.30 22.45,29.15 22.3,29.3 19.29,29.3 16.19,26.2 4.2,26.2 3.75,25.75 2.25,25.75 J6.7
GPIO6: length 21.8
  TOP w0.2: J6.8 16.12,26.7 19.12,29.7 19.13,29.7 19.18,29.75 22.47,29.75 22.57,29.65 U6.29
GPIO7: length 24.4
  TOP w0.2: U6.28 19.02,30.15 18.97,30.1 18.96,30.1 15.96,27.1 4.4,27.1 3.85,27.65 2.35,27.65 J6.9
JTAGEN: length 29.3
  TOP w0.2: U6.15 22.35,36.65 v1(16.3,42.7)
  BOTTOM w0.2: v1(16.3,42.7) 14.28,44.73 7.08,44.73 2.8,49 2.8,50.8 J5.8
KEY0: length 31.6
  TOP w0.2: U6.87 51.44,33.15 51.51,33.08 57.98,33.08 58.7,33.8 58.7,36.9 59.2,37.4 C1.2 R7.2 58.5,38.4 57.97,38.93 SW2.2 SW2.1
KEY1: length 45.4
  TOP w0.2: U6.86 58.55,32.65 59.1,33.2 59.1,34.33 C2.2 R8.2 59.77,36.54 59.94,36.7 61.91,36.7 62.5,37.29 62.5,38.1 63.5,39.1 63.5,50.85 SW1.2 SW1.1
KEY2: length 35.9
  TOP w0.2: SW3.1 66.2,47.75 66.2,41.85 SW3.2 64.65,39.45 62.9,37.7 62.9,35.29 62,34.39 60.03,34.39 59.77,34.14 R9.2 C3.2 59.24,32.6 58.79,32.15 U6.85
RESET_N: length 31.8
  TOP w0.2: SW4.1 66.1,36.15 66.1,30.05 SW4.2 60.84,28.6 59.77,29.66 C6.2 R10.2 59.24,31.2 58.79,31.65 U6.84
RS485_A1: length 10.9
  TOP w0.2: U10.14 57.12,13.08 56.3,13.9 54.1,13.9 53.3,13.1 U10.11 53.3,10.06 52.67,9.43 J12.1
RS485_A2: length 10.9
  TOP w0.2: J11.1 38.35,9.43 38.98,10.06 U9.11 38.98,13.19 39.7,13.9 42,13.9 42.8,13.11 U9.14
RS485_A3: length 10.9
  TOP w0.2: U8.14 28.48,13.12 27.8,13.8 25.3,13.8 24.66,13.16 U8.11 24.66,10.06 24.03,9.43 J10.1
RS485_A4: length 10.9
  TOP w0.2: U7.14 14.15,13.14 13.5,13.8 11,13.8 10.35,13.14 U7.11 10.35,10.06 9.71,9.43 J9.1
RS485_A5: length 11.1
  TOP w0.2: U4.14 54.84,56.9 55.64,56.1 57.9,56.1 58.66,56.85 U4.11 58.66,60.22 J4.1
RS485_A6: length 10.8
  TOP w0.2: U3.14 41.52,56.9 42.42,56 44.44,56 45.34,56.9 U3.11 45.34,58.38 45.97,59.01 J3.1
RS485_A7: length 11
  TOP w0.2: U2.14 27.2,56.8 28.1,55.9 30.2,55.9 31.02,56.72 U2.11 31.02,58.38 31.65,59.01 J2.1
RS485_A8: length 10.9
  TOP w0.2: U1.14 12.88,56.9 13.88,55.9 15.7,55.9 16.7,56.9 U1.11 16.7,58.38 17.33,59.01 J1.1
RS485_B1: length 7.7
  TOP w0.2: U10.12 54.58,13 54.77,13.2 55.65,13.2 55.84,13 U10.13 55.84,10.06 56.48,9.43 J12.2
RS485_B2: length 7.7
  TOP w0.2: J11.2 42.16,9.43 41.52,10.06 U9.13 41.52,13 41.33,13.2 40.45,13.2 40.26,13 U9.12
RS485_B3: length 7.7
  TOP w0.2: U8.12 25.93,13 26.13,13.2 27.01,13.2 27.2,13 27.2,10.06 27.84,9.43 J10.2
RS485_B4: length 7.7
  TOP w0.2: J9.2 13.52,9.43 12.88,10.06 U7.13 12.88,13 12.69,13.2 11.81,13.2 11.62,13 U7.12
RS485_B5: length 7.8
  TOP w0.2: J4.2 56.48,60.47 57.38,59.57 U4.12 57.38,56.9 57.19,56.7 56.31,56.7 56.12,56.9 U4.13
RS485_B6: length 7.7
  TOP w0.2: J3.2 42.16,59.01 42.8,58.38 U3.13 42.8,56.9 42.99,56.7 43.87,56.7 44.06,56.9 U3.12
RS485_B7: length 7.7
  TOP w0.2: J2.2 27.84,59.01 28.48,58.38 28.48,56.9 28.67,56.7 29.55,56.7 29.75,56.9 U2.12
RS485_B8: length 7.7
  TOP w0.2: U1.12 15.43,56.9 15.13,56.6 14.45,56.6 14.15,56.9 U1.13 14.15,58.38 13.52,59.01 J1.2
RS485_DE1: length 18.8
  TOP w0.2: U6.75 46.35,27.15 53.4,20.1 55,20.1 55.84,19.25 U10.4 55.84,16.8 55.65,16.6 54.77,16.6 54.58,16.8 U10.5
RS485_DE2: length 9.9
  TOP w0.2: U9.5 40.26,16.8 40.45,16.6 41.33,16.6 41.52,16.8 U9.4 41.52,18.8 41.75,19.03 U6.69
RS485_DE3: length 20
  TOP w0.2: U8.5 25.93,16.8 26.13,16.6 27.01,16.6 27.2,16.8 27.2,18.8 27.33,18.93 27.34,18.93 27.68,19.26 27.68,19.27 28.2,19.8 36.8,19.8 39.35,22.35 39.35,22.87 39.25,22.97 U6.64
RS485_DE4: length 31.7
  TOP w0.2: U7.5 11.62,16.8 11.82,16.59 12.68,16.59 12.88,16.8 U7.4 12.88,18.89 15,21 35.5,21 36.75,22.25 U6.59
RS485_DE5: length 20.3
  TOP w0.2: U4.5 57.38,53.1 57.19,53.3 56.31,53.3 56.12,53.1 U4.4 56.12,51.62 55.4,50.91 55.4,48.2 49.35,42.15 U6.105
RS485_DE6: length 10.2
  TOP w0.2: U6.111 42.25,50.55 42.8,51.1 U3.4 42.8,53.1 42.99,53.3 43.9,53.3 44,53.2 44,53.17 44.06,53.1 U3.5
RS485_DE7: length 18
  TOP w0.2: U6.119 38.25,46.92 35.97,49.2 29.2,49.2 28.48,49.92 28.48,53.12 28.66,53.3 29.55,53.3 29.75,53.1 U2.5
RS485_DE8: length 21.8
  TOP w0.2: U1.5 15.43,53.1 15.23,53.3 14.35,53.3 14.15,53.1 U1.4 14.15,49.84 16.2,47.8 26.8,47.8 27.75,46.85 U6.140
RS485_RXD1: length 16.6
  TOP w0.2: U10.3 57.12,18.8 55.32,20.6 53.5,20.6 46.45,27.65 U6.76
RS485_RXD2: length 6.6
  TOP w0.2: U6.70 42.25,19.35 42.8,18.8 U9.3
RS485_RXD3: length 15.7
  TOP w0.2: U6.65 39.75,22.18 36.97,19.4 29.07,19.4 28.48,18.8 U8.3
RS485_RXD4: length 28
  TOP w0.2: U6.60 37.25,22.05 35.8,20.6 15.2,20.6 14.15,19.55 U7.3
RS485_RXD5: length 15.8
  TOP w0.2: U4.3 54.84,48.25 49.25,42.65 U6.106
RS485_RXD6: length 6.8
  TOP w0.2: U6.113 41.25,46.83 41.8,47.38 41.8,50.6 41.52,50.88 U3.3
RS485_RXD7: length 14.9
  TOP w0.2: U2.3 27.2,51.62 27.9,50.93 27.9,49.9 29,48.8 35.8,48.8 37.75,46.85 U6.120
RS485_RXD8: length 18.7
  TOP w0.2: U6.141 27.25,46.78 26.63,47.4 15.9,47.4 13.6,49.7 13.6,50.91 12.88,51.62 U1.3
RS485_TXD1: length 18.3
  TOP w0.2: D12.2 49.05,15.7 50.02,16.68 52.66,16.68 53.3,17.32 U10.6 53.3,19.62 46.27,26.65 U6.74
RS485_TXD2: length 12.4
  TOP w0.2: U6.66 40.25,19.54 38.98,18.27 U9.6 38.98,17.32 38.34,16.68 35.7,16.68 34.73,15.7 D11.2
RS485_TXD3: length 23.3
  TOP w0.2: D10.2 20.41,15.7 21.38,16.68 24.02,16.68 24.66,17.32 U8.6 24.66,18.8 26.06,20.2 35.96,20.2 37.9,22.14 37.9,22.61 38.25,22.96 U6.62
RS485_TXD4: length 35.4
  TOP w0.2: U6.58 36.25,22.55 35.1,21.4 14.7,21.4 12.7,19.4 10.94,19.4 10.35,18.8 U7.6 10.35,17.5 9.52,16.68 7.06,16.68 6.09,15.7 D9.2
RS485_TXD5: length 25.2
  TOP w0.2: U6.102 48.55,40.65 49.27,41.38 49.27,41.39 49.61,41.73 49.62,41.73 55.9,48 55.9,50.2 56.4,50.7 57.73,50.7 58.66,51.62 U4.6 58.66,52.58 59.25,53.17 61.89,53.17 62.91,54.2 D4.2
RS485_TXD6: length 13.8
  TOP w0.2: U6.110 42.75,50.35 43.4,51 44.71,51 45.34,51.62 U3.6 45.34,52.58 45.93,53.17 48.57,53.17 49.59,54.2 D3.2
RS485_TXD7: length 17.9
  TOP w0.2: D2.2 35.27,54.2 34.25,53.17 31.61,53.17 31.02,52.58 U2.6 31.02,50.09 31.5,49.6 36.13,49.6 38.75,46.98 U6.118
RS485_TXD8: length 24.4
  TOP w0.2: U6.135 30.25,46.83 28.78,48.3 17.1,48.3 16.7,48.7 U1.6 16.7,52.58 17.29,53.17 19.93,53.17 20.95,54.2 D1.2
TCK: length 37.3
  TOP w0.2: J5.1 5.5,57.8 6.7,56.6 6.7,47.4 8.3,45.8 9.98,45.8 10.35,46.17 U5.4 R6.2 12.6,46.9 13.2,46.3 13.2,44.2 22.25,35.15 U6.18
TDI: length 27.2
  TOP w0.2: U6.19 22.05,34.65 13.26,43.44 10.76,43.44 10.35,43.85 U5.3 10.4,44.15 v1(10.4,45.3)
  BOTTOM w0.2: J5.9 8.3,45.3 v1(10.4,45.3)
TDO: length 35.7
  TOP w0.2: U6.20 21.85,34.15 13.7,42.3 9.7,42.3 8.45,43.55 8.45,43.85 ; J5.3 5.5,55.8 6.2,55.1 6.2,44.3 6.65,43.85 8.45,43.85 ; 8.45,43.85 U5.1
TF_CLK: length 13.3
  TOP w0.2: U6.91 50.85,35.15 51.8,36.1 51.8,39.26 v1(52.74,40.2)
  BOTTOM w0.2: RE4.5 53.47,40.15 53.42,40.2 v1(52.74,40.2)
TF_CMD: length 12.6
  TOP w0.2: v1(52.93,37.95) 52.3,37.32 52.3,36 50.95,34.65 U6.90
  BOTTOM w0.2: R28.2 v1(52.93,37.95) RE4.3
TF_DATA0: length 15.5
  TOP w0.2: U6.92 50.75,35.65 51.3,36.2 51.3,39.7 v1(51.8,40.2)
  BOTTOM w0.2: RE4.7 R20.2 51.75,41.81 51.8,41.76 v1(51.8,40.2)
TF_DATA1: length 16.4
  TOP w0.2: U6.93 46.94,36.15 47.01,36.08 50.38,36.08 50.9,36.6 50.9,40.11 51.56,40.77 51.58,40.77 52.97,42.17 v1(52.97,43.45)
  BOTTOM w0.2: R19.2 v1(52.97,43.45) RE4.8
TF_DATA2: length 11.4
  TOP w0.2: U6.88 v1(51.75,33.65)
  BOTTOM w0.2: RE4.1 R30.2 v1(51.75,33.65)
TF_DATA3: length 12.1
  TOP w0.2: v1(52.9,36.85) 52.9,35.9 51.15,34.15 U6.89
  BOTTOM w0.2: R29.2 v1(52.9,36.85) RE4.2
TMS: length 32
  TOP w0.2: R5.1 9.14,48.45 9.16,48.48 9.64,48.48 9.66,48.45 11.75,48.45 13.8,46.4 13.8,44.2 21.85,36.15 U6.16 ; R5.1 U5.6 ; R5.1 7.65,48.45 v1(7.6,48.4)
  BOTTOM w0.2: v1(7.6,48.4) 6.1,48.4 5.1,49.4 5.1,52.5 J5.5
UART_RXD0: length 10.7
  TOP w0.2: U6.21 18.65,33.65 18.6,33.6 v1(18,33.6)
  BOTTOM w0.2: U11.25 14.4,32.92 14.82,32.5 16.9,32.5 v1(18,33.6)
UART_RXD1: length 32.5
  TOP w0.2: v1(29.9,22.7) 29.8,22.7 29.8,22.9 29.75,22.95 U6.45
  BOTTOM w0.2: J8.2 3,13.6 7.5,18.1 23.8,18.1 28.4,22.7 v1(29.9,22.7)
UART_TXD0: length 11.4
  TOP w0.2: v1(18.1,32.5) 18.75,33.15 U6.22
  BOTTOM w0.2: U11.26 13.9,32.8 14.63,32.07 17.67,32.07 v1(18.1,32.5)
UART_TXD1: length 33.5
  TOP w0.2: U6.44 29.25,22.55 v1(28.8,22.1)
  BOTTOM w0.2: J8.3 3.9,12.3 3.9,13.9 7.7,17.7 24.4,17.7 26.43,19.73 26.43,19.74 26.76,20.07 26.77,20.07 v1(28.8,22.1)
USER_LED0: length 10
  TOP w0.2: U6.79 47.05,29.15 50.3,25.9 R11.1
USER_LED1: length 10.4
  TOP w0.2: U6.78 46.85,28.65 51.1,24.4 R12.1
USER_LED2: length 10.8
  TOP w0.2: U6.77 46.65,28.15 51.9,22.9 R14.1
N16189511: length 3.6
  TOP w0.3: U10.15 v1(58.38,13.38)
  BOTTOM w0.3: C96.1 C104.1 58.38,14.1 v1(58.38,13.38)
N16194711: length 3.6
  TOP w0.3: U10.10 v1(52.03,13.34)
  BOTTOM w0.3: C97.2 C105.2 52.03,14.13 v1(52.03,13.34)
N16196004: length 3.6
  TOP w0.3: U9.10 v1(37.72,13.38)
  BOTTOM w0.3: C99.2 C107.2 37.72,14.13 v1(37.72,13.38)
N16196080: length 3.6
  TOP w0.3: U9.15 v1(44.06,13.37)
  BOTTOM w0.3: v1(44.06,13.37) 44.06,14.1 C106.1 C98.1
N16196868: length 3.6
  TOP w0.3: U8.10 v1(23.39,13.39)
  BOTTOM w0.3: v1(23.39,13.39) 23.39,14.13 C109.2 C101.2
N16196960: length 3.6
  TOP w0.3: U8.15 v1(29.75,13.36)
  BOTTOM w0.3: v1(29.75,13.36) 29.75,14.1 C108.1 C100.1
N16197220: length 3.6
  TOP w0.3: U7.10 v1(9.07,13.32)
  BOTTOM w0.3: C103.2 C111.2 9.07,14.13 v1(9.07,13.32)
N16197296: length 3.6
  TOP w0.3: U7.15 v1(15.43,13.32)
  BOTTOM w0.3: v1(15.43,13.32) 15.43,14.1 C110.1 C102.1
N16223658: length 3.6
  TOP w0.3: U4.10 v1(59.92,56.52)
  BOTTOM w0.3: v1(59.92,56.52) 59.92,55.77 C10.2 C18.2
N16223734: length 3.6
  TOP w0.3: U4.15 v1(53.58,56.48)
  BOTTOM w0.3: v1(53.58,56.48) 53.58,55.8 C11.1 C19.1
N16224068: length 3.6
  TOP w0.3: U3.10 v1(46.6,56.51)
  BOTTOM w0.3: v1(46.6,56.51) 46.6,55.77 C12.2 C20.2
N16224152: length 3.6
  TOP w0.3: U3.15 v1(40.26,56.55)
  BOTTOM w0.3: C21.1 C13.1 40.26,55.8 v1(40.26,56.55)
N16224546: length 3.6
  TOP w0.3: U2.10 v1(32.28,56.52)
  BOTTOM w0.3: C22.2 C14.2 32.28,55.77 v1(32.28,56.52)
N16224642: length 3.6
  TOP w0.3: U2.15 v1(25.93,56.44)
  BOTTOM w0.3: v1(25.93,56.44) 25.93,55.8 C15.1 C23.1
N16224916: length 3.6
  TOP w0.3: U1.10 v1(17.96,56.53)
  BOTTOM w0.3: C24.2 C16.2 17.96,55.77 v1(17.96,56.53)
N16224992: length 3.6
  TOP w0.3: 11.62,57.9 v1(11.62,56.52)
  BOTTOM w0.3: v1(11.62,56.52) 11.62,55.8 C17.1 C25.1
N16238202: length 3.3
  TOP w0.2: v1(30.3,43.8) 29.75,44.35 U6.136
  BOTTOM w0.2: v1(30.3,43.8) 30.6,43.5 R24.1
N16238206: length 3.2
  TOP w0.2: U6.138 28.75,44.15 v1(29.4,43.5)
  BOTTOM w0.2: v1(29.4,43.5) R25.1
N16238215: length 3.1
  TOP w0.2: U6.129 33.25,43.95 v1(32.9,43.6)
  BOTTOM w0.2: v1(32.9,43.6) R23.1
N16238304: length 4.4
  TOP w0.2: U6.126 34.75,44.05 v1(35.3,43.5)
  BOTTOM w0.2: v1(35.3,43.5) R22.1 R21.2
N16244234: length 8.1
  TOP w0.2: RE1.1 10.5,37.5 11.1,38.1 v1(11.1,38.6)
  BOTTOM w0.2: U11.8 12.9,39.2 12.7,39.4 11.4,39.4 11.1,39.1 v1(11.1,38.6) 11.1,37.84 11.32,37.61 U11.7
N16245813: length 2.3
  BOTTOM w0.2: R27.2 13.4,40.21 13.2,40.01 13.2,39.49 13.4,39.29 U11.9
N16273316: length 1.5
  TOP w0.2: D12.1 R18.2
N16274102: length 1.5
  TOP w0.2: D11.1 R17.2
N16274310: length 1.5
  TOP w0.2: D10.1 R16.2
N16274517: length 1.5
  TOP w0.2: D9.1 R15.2
N16274721: length 1.6
  TOP w0.2: R4.2 D4.1
N16274926: length 1.6
  TOP w0.2: R3.2 D3.1
N16275140: length 1.6
  TOP w0.2: R2.2 D2.1
N16275349: length 1.6
  TOP w0.2: R1.2 D1.1
N16281642: length 4.2
  BOTTOM w0.2: 63.44,17.5 63.44,18 64.83,19.4 65.45,19.4 R32.1
N16281718: length 4.5
  BOTTOM w0.2: U12.8 64.7,18.53 65.18,19 66.35,19 C78.1
N16281770: length 1.7
  BOTTOM w0.2: R33.1 63.89,20.44 64.14,20.44 64.75,21.05 C79.2
N16281802: length 13.8
  TOP w0.2: v1(62.2,14.1) C9.1 62.98,19.69 66.25,22.95 RE3.1
  BOTTOM w0.2: v1(62.2,14.1) 62.2,12.76 62.16,12.73 U12.3
N16281822: length 3.2
  TOP w0.2: 63.88,14.1 v1(64.7,14.1)
  BOTTOM w0.2: U12.1 64.7,12.73 64.7,12.73 v1(64.7,14.1)
N16281842: length 4
  BOTTOM w0.2: 60.9,17.5 60.9,19.51 61,19.61 R35.2 R34.2
N16282182: length 1.6
  TOP w0.2: R13.1 D8.1
N16289685: length 1.5
  TOP w0.2: R12.2 D6.2
N16289689: length 1.5
  TOP w0.2: R14.2 D7.2
N16289713: length 1.5
  TOP w0.2: R11.2 D5.2
N16290377: length 2.5
  BOTTOM w0.2: U11.11 14.4,39.29 14.7,39.59 D13.2
N16290384: length 2
  BOTTOM w0.2: D13.1 15.5,42.6 16,42.1 R26.2
N16347907: length 4.1
  BOTTOM w0.2: C79.1 63.35,18.6 62.76,18.6 62.16,18 U12.6

## Copper pours and planes (outline as drawn; the poured copper is in the pictures)
D3V3 on POWER: 3,0.1 0.95,0.95 0.1,3 0.1,67 0.95,69.05 3,69.9 67,69.9 69.05,69.05 69.9,67 69.9,3 69.05,0.95 67,0.1
GND on GND: 3,0.1 0.95,0.95 0.1,3 0.1,67 0.95,69.05 3,69.9 67,69.9 69.05,69.05 69.9,67 69.9,3 69.05,0.95 67,0.1

## Text on the board
Ref Des/Silkscreen Bottom: 3V3 | RX | TX | GND
Ref Des/Silkscreen Top: S_GND | 485A | 485B | 7 | 5 | 3 | 1 | 3V3 | GND | 6 | 4 | 2 | 0 | 5V+ | Date:20170505 | VER:V1.0
NCLEGEND-1-4: FIGURE | SIZE | 0.25 | 0.701 | 0.8 | 1.0008 | 1.5 | 2.5 | 3.0 | DRILL CHART: TOP to BOTTOM | ALL UNITS ARE IN MILLIMETERS | PLATED | NON-PLATED | QTY | 224 | 8 | 10 | 24 | 1 | 4
